# EAGLE board BiodataModular_007_IOboard (EAGLE 9.6.2)
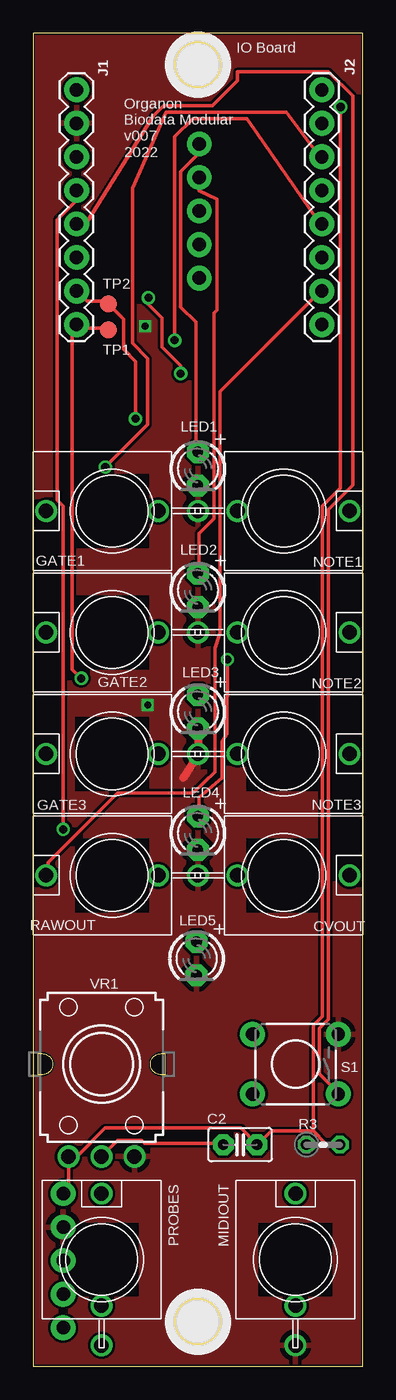
[diagram p0: board, top side]
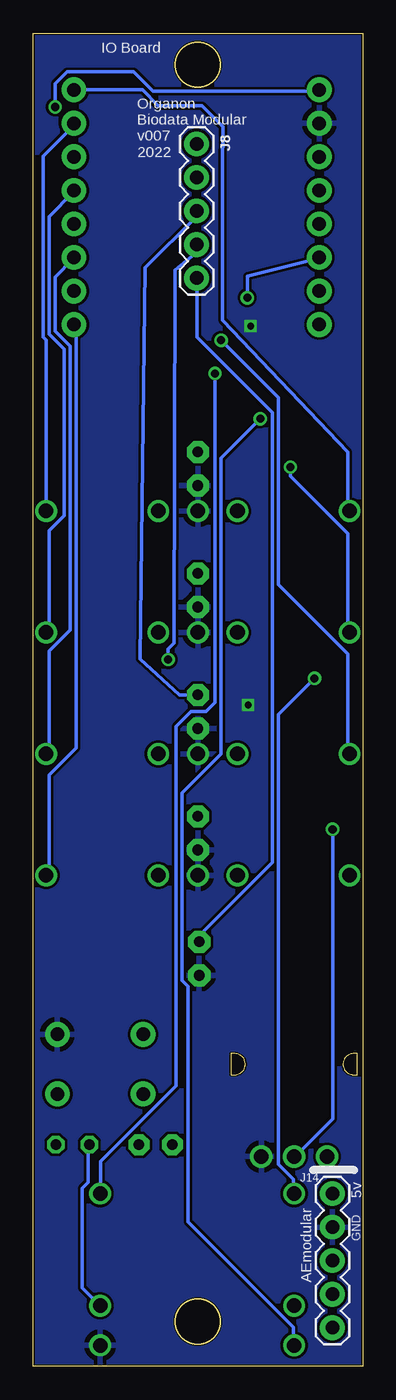
[diagram p1: board, bottom side, seen from below]

Size 25 x 101 mm. Coordinates in mm from the lower left corner, seen from the top.
Outline: 0,0 25,0 25,101 0,101 0,0
Outline: circle at 12.5,98.6 radius 1.7
Outline: circle at 12.5,3.4 radius 1.7
Copper layers (1*16): Top 0.035mm / dielectric 1.5mm / Bottom 0.035mm
Design rules "default *": minimum track width 10mil, minimum drill 24mil, track to track 8mil, track to pad 8mil, pad to pad 8mil, via to via 8mil, smd to smd 8mil, copper to edge 5mil, drill to drill 8mil, minimum pad ring 10mil, minimum via ring 8mil, stop-mask expansion 4mil, vias tented up to drill 0mil, thermal gap 15mil

## Footprints (pad centres in the part's own frame; a part is rotated, then mirrored left to right if it is on the bottom)
C2.5-2 = drill 0.813 pad 1.6 octagon: 1 -1.27,0; 2 1.27,0
WQP-PJ301M-12_JACK = drill 1.1: P$1 0,5; P$2 0,-3.5; P$3 0,-6.5
1X08 = drill 1.016 pad 1.88: 1 0,0; 2 2.54,0; 3 5.08,0; 4 7.62,0; 5 10.16,0; 6 12.7,0; 7 15.24,0; 8 17.78,0
1X05 = drill 1.016 pad 1.88: 1 0,0; 2 2.54,0; 3 5.08,0; 4 7.62,0; 5 10.16,0
LED3MM = drill 0.813 pad 1.676 octagon: A -1.27,0; K 1.27,0
0204V = drill 0.813 octagon: 1 -1.27,0; 2 1.27,0
TACTILE_SWITCH_PTH_6.0MM = drill 1.016 pad 1.88: 1 -3.251,2.261; 2 3.251,2.261; 3 -3.251,-2.261; 4 3.251,-2.261
B1,27 = smd 1.27 x 1.27: TP 0,0
EVUF = drill 1.1 pad 1.676: 1 -2.5,-7; 2 0,-7; 3 2.5,-7

## Placement (x,y rotation side)
C2  0.1uF  [C2.5-2]  15.7,16.8 180 top
CVOUT  WQP-PJ301M-12_JACK  [WQP-PJ301M-12_JACK]  19,37.2 270 top
GATE1  WQP-PJ301M-12_JACK  [WQP-PJ301M-12_JACK]  6,64.8 90 top
GATE2  WQP-PJ301M-12_JACK  [WQP-PJ301M-12_JACK]  6,55.6 90 top
GATE3  WQP-PJ301M-12_JACK  [WQP-PJ301M-12_JACK]  6,46.4 90 top
J1  [1X08]  3.3,96.7 270 top
J2  [1X08]  21.9,96.7 270 top
J8  [1X05]  12.6,92.6 270 bottom
J14  [1X05]  2.3,13.1 270 bottom
LED1  [LED3MM]  12.5,68 270 top
LED2  [LED3MM]  12.5,58.8 270 top
LED3  [LED3MM]  12.5,49.6 270 top
LED4  [LED3MM]  12.5,40.4 270 top
LED5  [LED3MM]  12.4,30.9 270 top
MIDIOUT  WQP-PJ301M-12_JACK  [WQP-PJ301M-12_JACK]  19.9,8.1 0 top
NOTE1  WQP-PJ301M-12_JACK  [WQP-PJ301M-12_JACK]  19,64.8 270 top
NOTE2  WQP-PJ301M-12_JACK  [WQP-PJ301M-12_JACK]  19,55.6 270 top
NOTE3  WQP-PJ301M-12_JACK  [WQP-PJ301M-12_JACK]  19,46.4 270 top
PROBES  WQP-PJ301M-12_JACK  [WQP-PJ301M-12_JACK]  5.2,8.1 0 top
R3  220  [0204V]  22,16.8 0 top
RAWOUT  WQP-PJ301M-12_JACK  [WQP-PJ301M-12_JACK]  6,37.2 90 top
S1  MOMENTARY-SWITCH-SPST-PTH-6.0MM  [TACTILE_SWITCH_PTH_6.0MM]  19.9,22.9 180 top
TP1  TPB1,27  [B1,27]  5.7,78.5 0 top
TP2  TPB1,27  [B1,27]  5.7,80.5 0 top
VR1  10k  [EVUF]  5.2,22.9 0 top

## Library data of the parts
C2 = capacitor-wima
CVOUT GATE1-GATE3 MIDIOUT NOTE1-NOTE3 PROBES RAWOUT = thonkiconn
J1 J2 = SparkFun-Connectors; PROD_ID: CONN-08438
J8 J14 = SparkFun-Connectors
LED1-LED5 = adafruit
R3 = rcl
S1 = SparkFun-Switches; PROD_ID: SWCH-08441; SF_SKU: COM-00097
TP1 TP2 = testpad
VR1 = sam-pot

## Nets
5VB: C2.1 J1.1 J14.1 R3.2 VR1.1
CVOUT: CVOUT.P$1 J2.8
G1OUT: GATE1.P$1 J2.1
G2OUT: GATE2.P$1 J2.3
G3OUT: GATE3.P$1 J2.5
GNDB: CVOUT.P$3 GATE1.P$3 GATE2.P$3 GATE3.P$3 J1.2 J14.2 LED1.K LED2.K LED3.K LED4.K LED5.K MIDIOUT.P$3 NOTE1.P$3 NOTE2.P$3 NOTE3.P$3 RAWOUT.P$3 S1.3 VR1.3
LED1BUSB: J8.1 LED1.A
LED2BUSB: J8.2 LED2.A
LED3BUSB: J8.3 LED3.A
LED4BUSB: J8.4 LED4.A
LED5BUSB: J8.5 LED5.A
MIDITIPB: J1.6 MIDIOUT.P$1
N$2: MIDIOUT.P$2 R3.1
NOTE1OUT: J2.2 NOTE1.P$1
NOTE2OUT: J2.4 NOTE2.P$1
NOTE3OUT: J2.6 NOTE3.P$1
POTB: C2.2 J1.4 VR1.2
PROBE1B: J1.7 PROBES.P$3 TP2.TP
PROBE2B: J1.8 PROBES.P$1 TP1.TP
RWOUT: J2.7 RAWOUT.P$1
SWITCHB: J1.5 S1.1

## Tracks (layer width: path | path; a pad name or v marks a point on that pad's centre or on a via)
5VB  (via drill 0.61)
  Top 0.254: 21.26,17.83 22.17,16.92 23.09,16.92 R3.2 | 21.26,17.83 18.06,17.83 17.14,16.92 C2.1 16.92,16.92 15.77,18.06 5.49,18.06 3.43,16 2.74,16 VR1.1 2.7,13.5 J14.1 | v23.32,95.4 23.32,66.52 21.95,65.15 21.95,26.52 21.26,25.83 21.26,17.83
  Bottom 0.254: v23.32,95.4 23.32,97.16 22.4,98.07 17.37,98.07 15.9,96.6 3.53,96.6 3.43,96.7 J1.1
CVOUT
  Bottom 0.254: CVOUT.P$1 23.77,37.26 23.77,44.81 21.72,46.86 21.72,78.87 J2.8
G1OUT
  Bottom 0.254: GATE1.P$1 1.14,64.92 1.14,69.27 10.63,79.25 10.63,90.64 10.6,93.9 12.2,95.5 15.5,95.5 16.69,96.69 16.69,96.7 21.72,96.7 J2.1
G2OUT  (via drill 0.61)
  Top 0.254: v5.49,68.12 8.69,71.32 8.69,76.35 7.54,77.5 7.54,89.24 10.09,94.98 19.2,94.98 21.72,91.67 J2.3
  Bottom 0.254: v5.49,68.12 5.49,67.44 1.14,63.09 1.14,55.78 GATE2.P$1
G3OUT  (via drill 0.61)
  Top 0.254: v10.74,77.72 10.74,93.15 12.12,94.53 16.23,94.53 21.72,86.64 J2.5
  Bottom 0.254: v10.74,77.72 6.4,73.38 6.4,59.21 1.14,53.95 1.14,46.41 GATE3.P$1
GNDB  (via drill 0.5)
  Top 0.61: LED3.K 12.5,46.3 11.4,44.6
  other vias: 8.7,50.1 8.5,78.8
  pour Top: 25.2,-0.1 25.2,101 0,101 0,0
  pour Bottom: 25.3,0.1 25.3,101 0,101 0,0
LED1BUSB
  Top 0.254: LED1.A 12.34,69.49 12.34,79.1 11.2,80.24 11.2,90.48 12.6,91.88 J8.1
LED2BUSB
  Top 0.254: LED2.A 12.57,60.12 12.57,63.09 13.72,64.24 13.72,79.78 13.95,80.01 13.95,88.4 12.6,89.04 J8.2
LED3BUSB
  Bottom 0.254: LED3.A 13.87,50.88 16.89,53.59 16.49,83.21 12.6,87.1 J8.3
LED4BUSB  (via drill 0.61)
  Top 0.254: v14.74,53.55 14.7,47.9 14.35,47.34 14.35,44.58 12.57,43.11 12.57,41.83 LED4.A
  Bottom 0.254: v14.74,53.55 14.74,54.35 14.3,54.8 14.24,83.04 12.7,84.28 12.7,84.88 J8.4
LED5BUSB
  Bottom 0.254: LED5.A 12.34,32.23 12.34,32.69 6.86,38.18 6.86,72.24 12.57,77.95 12.57,82.41 J8.5
MIDITIPB  (via drill 0.61)
  Top 0.254: v8.76,80.95 8.76,80.44 9.8,79.4 9.8,77.2 11.2,75.8 v11.2,75.21
  Bottom 0.254: v11.2,75.21 11.2,50.29 11.89,49.61 13.03,49.61 14.17,48.46 14.17,21.26 19.89,15.54 19.89,13.26 MIDIOUT.P$1 | v8.76,80.95 8.76,82.57 3.43,83.9 J1.6
N$2
  Bottom 0.254: R3.1 20.8,16.69 20.8,13.95 21.26,13.49 21.26,5.94 20.12,4.8 MIDIOUT.P$2
NOTE1OUT
  Bottom 0.254: NOTE1.P$1 24,64.92 24,77.72 24.23,77.95 24.23,91.67 21.95,93.95 J2.2
NOTE2OUT
  Bottom 0.254: NOTE2.P$1 23.77,55.78 23.77,63.32 22.63,64.47 22.63,77.04 23.77,78.18 23.77,87.1 21.95,88.92 J2.4
NOTE3OUT
  Bottom 0.254: NOTE3.P$1 23.77,46.41 23.77,54.18 22.17,55.78 22.17,77.27 23.32,78.41 23.32,82.53 21.95,83.9 J2.6
POTB  (via drill 0.61)
  Top 0.254: C2.2 14.4,16.92 8.46,16.92 8.23,17.14 6.4,17.14 5.26,16 VR1.2 | v2.29,40.69 2.29,65.15 1.83,65.61 1.83,86.87 3.2,88.24 3.2,88.92 J1.4
  Bottom 0.254: v2.29,40.69 2.29,18.75 5.03,16 VR1.2
PROBE1B  (via drill 0.61)
  Top 0.254: J1.7 3.43,81.38 4.12,80.7 5.49,80.7 TP2.TP 5.71,80.47 6.86,79.32 6.86,77.04 7.77,76.12 v7.77,71.78
  Bottom 0.254: v7.77,71.78 10.74,68.81 10.74,46.41 13.72,43.43 13.72,29.26 13.26,28.8 13.26,10.97 5.26,2.97 5.26,1.6 PROBES.P$3
PROBE2B  (via drill 0.61)
  Top 0.254: TP1.TP 5.49,78.64 3.66,78.64 3.43,78.87 J1.8 3.2,78.87 2.97,78.64 2.97,52.81 v3.66,52.12
  Bottom 0.254: v3.66,52.12 6.4,49.38 6.4,15.32 5.26,14.17 5.26,13.26 PROBES.P$1
RWOUT
  Top 0.254: RAWOUT.P$1 1.14,37.26 1.14,38.18 6.4,43.43 12.12,43.43 13.8,45.02 13.8,54.38 14.17,55.55 14.17,73.84 21.72,81.38 J2.7
SWITCHB
  Top 0.254: J1.5 3.43,86.64 4.06,86.64 9.1,94.7 9.9,95.5 13.6,95.5 15.49,97.39 15.49,98.07 22.4,98.07 24.23,96.24 24.23,66.75 22.4,64.92 22.4,26.29 21.72,25.6 21.72,22.17 23.09,20.8 S1.1

## Text on the board
tNames: IO Board | Organon / Biodata Modular / v007 / 2022 | LED1
bNames: IO Board | Organon / Biodata Modular / v007 / 2022 | 5v | AEmodular | GND
tValues: 220